# Allegro board EVK_SOM.brd
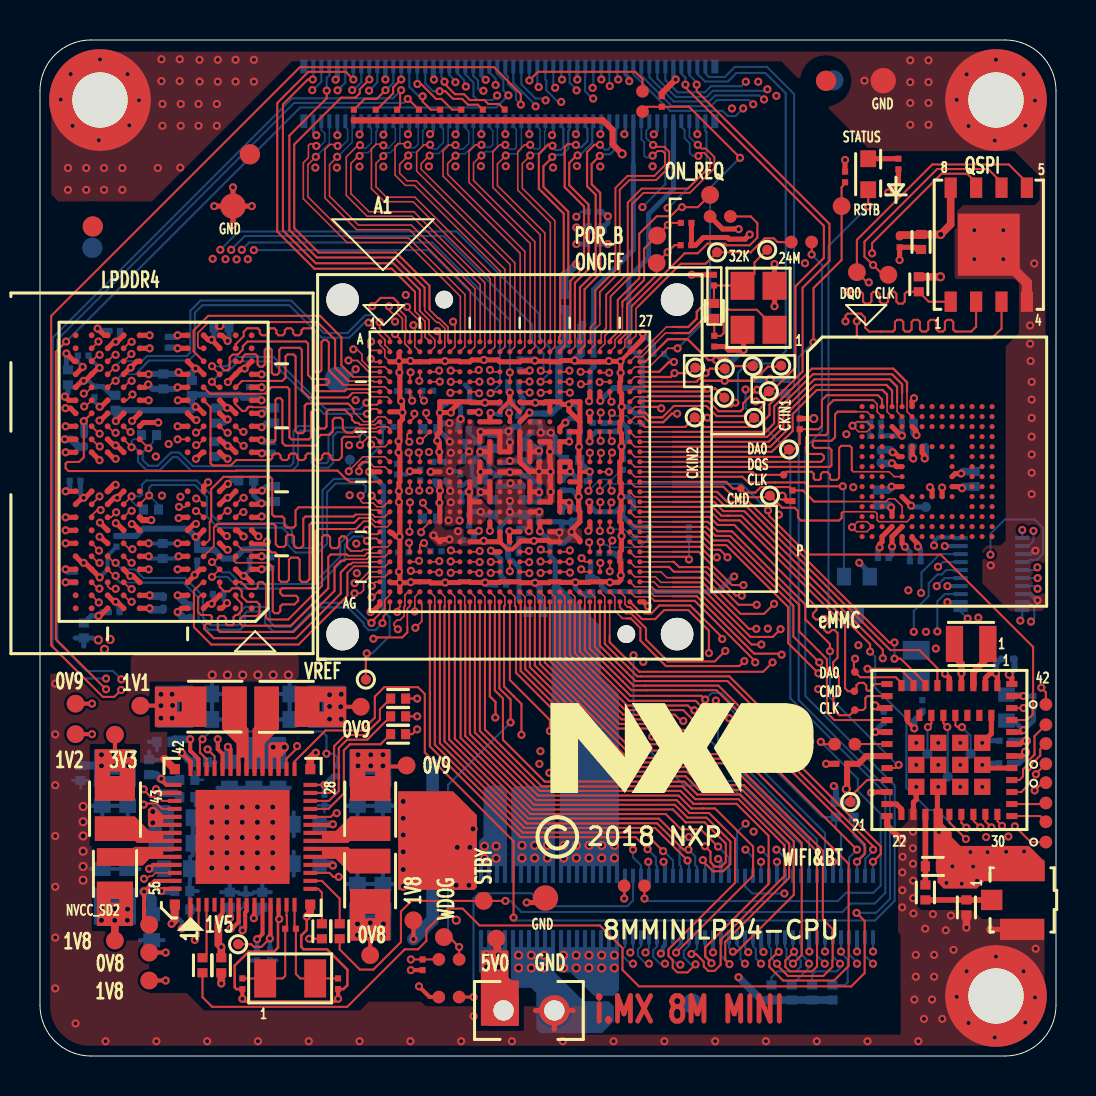
[diagram p0: board, top side]
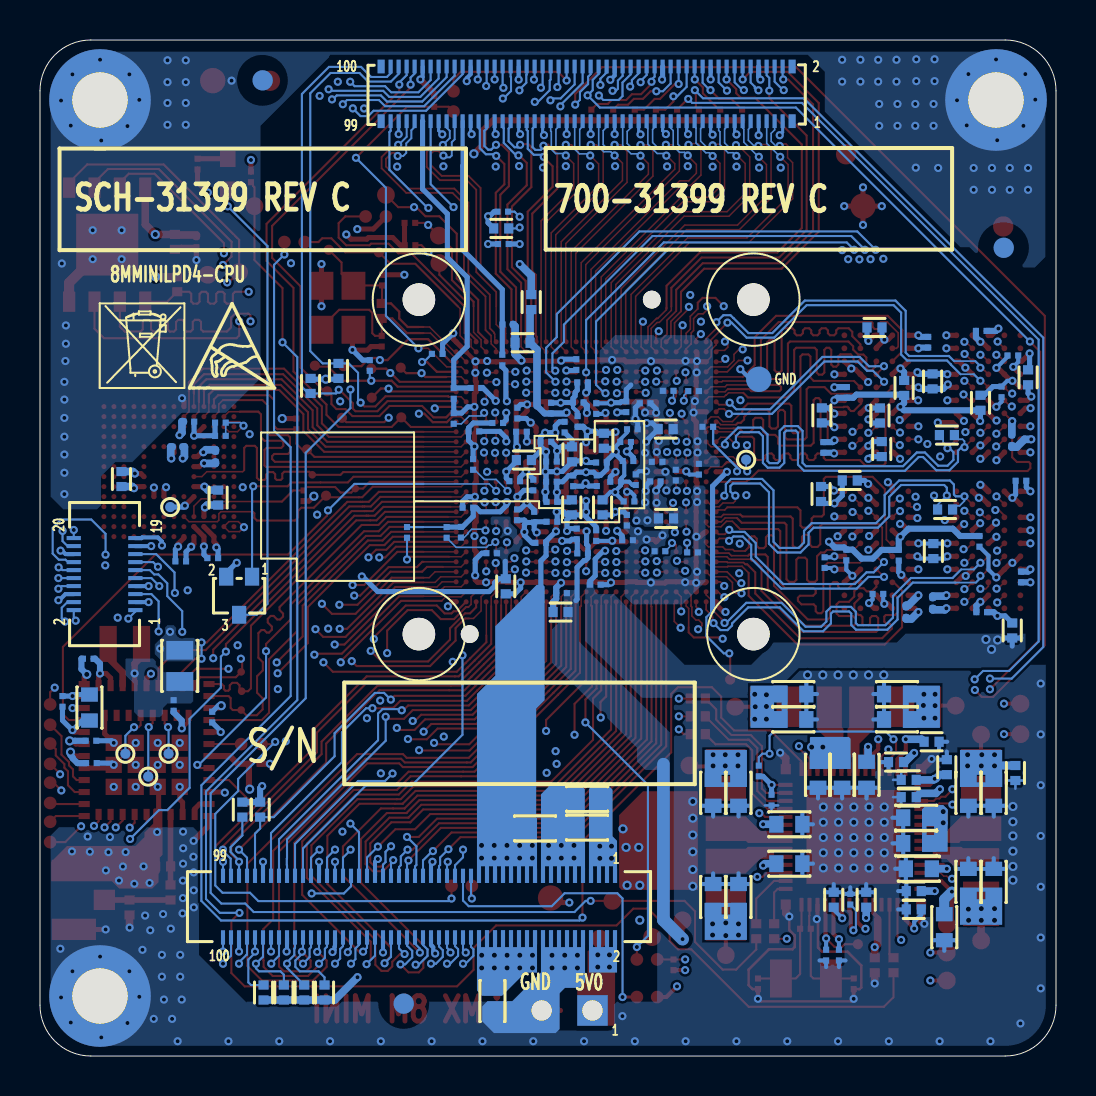
[diagram p1: board, bottom side, seen from below]

Outline 50.8 x 50.8 mm; copper layers: TOP, L2_GND_1, L3_IN1, L4_GND_2, L5_PWR_1, L6_PWR_2, L7_GND_3, BOTTOM. Coordinates in mm from the lower left corner of the outline.
Outline path: 0,48.26 0,2.54 arc(0.74,0.74) 2.54,0 48.26,0 arc(50.06,0.74) 50.8,2.54 50.8,48.26 arc(50.06,50.06) 48.26,50.8 2.54,50.8 arc(0.74,50.06) 0,48.26

## Design rules (mm)
constraint set DEFAULT: min track width 0.104
net group DIFFPAIR4: nets USB2_DN USB2_DP
net group DIFFPAIR5: nets USB1_DN USB1_DP
net group DIFFPAIR6: nets PCIE_TXN PCIE_TXP
net group DIFFPAIR7: nets PCIE_CLKN PCIE_CLKP
net group DIFFPAIR8: nets PCIE_RXN PCIE_RXP
net group DIFFPAIR9: nets DSI_DN3 DSI_DP3
net group DIFFPAIR10: nets DSI_DN2 DSI_DP2
net group DIFFPAIR11: nets DSI_CKN DSI_CKP
net group DIFFPAIR12: nets DSI_DN1 DSI_DP1
net group DIFFPAIR13: nets DSI_DN0 DSI_DP0
net group DIFFPAIR19: nets CSI_DN0 CSI_DP0
net group DIFFPAIR20: nets CSI_DN1 CSI_DP1
net group DIFFPAIR21: nets CSI_CKN CSI_CKP
net group DIFFPAIR22: nets CSI_DN2 CSI_DP2
net group DIFFPAIR23: nets CSI_DN3 CSI_DP3
net group DDRB_DATA1: nets DRAM_DATA7_B
net group M-DDRA-DATA0: nets DRAM_DATA0_A DRAM_DATA1_A DRAM_DATA2_A DRAM_DATA3_A DRAM_DATA4_A DRAM_DATA5_A DRAM_DATA6_A DRAM_DATA7_A DRAM_DMI0_A DRAM_SDQS0_C_A DRAM_SDQS0_T_A
net group M-DDRA-DATA1: nets DRAM_DATA8_A DRAM_DATA9_A DRAM_DATA10_A DRAM_DATA11_A DRAM_DATA12_A DRAM_DATA13_A DRAM_DATA14_A DRAM_DATA15_A DRAM_DMI1_A DRAM_SDQS1_C_A DRAM_SDQS1_T_A
net group M-DDRB-DATA1: nets DRAM_DATA0_B DRAM_DATA1_B DRAM_DATA2_B DRAM_DATA3_B DRAM_DATA4_B DRAM_DATA5_B DRAM_DATA6_B DRAM_DMI0_B DRAM_SDQS0_C_B DRAM_SDQS0_T_B
net group M-DDRB_DATA0: nets DRAM_DATA8_B DRAM_DATA9_B DRAM_DATA10_B DRAM_DATA11_B DRAM_DATA12_B DRAM_DATA13_B DRAM_DATA14_B DRAM_DATA15_B DRAM_DMI1_B DRAM_SDQS1_C_B DRAM_SDQS1_T_B
net group M-DDRRESS-A: nets DRAM_CA0_A DRAM_CA1_A DRAM_CA2_A DRAM_CA3_A DRAM_CA4_A DRAM_CA5_A DRAM_CKE0_A DRAM_CKE1_A DRAM_NCS0_A DRAM_NCS1_A
net group M-DDRRESS-B: nets DRAM_CA0_B DRAM_CA1_B DRAM_CA2_B DRAM_CA3_B DRAM_CA4_B DRAM_CA5_B DRAM_CKE0_B DRAM_CKE1_B DRAM_NCS0_B DRAM_NCS1_B
net group M-EMMC: nets SD3_DATA1 SD3_DATA2 SD3_DATA3 SD3_DATA4 SD3_DATA5 SD3_DATA6 SD3_DATA7 SD3_STROBE
net group M-SD1: nets SD1_CLK SD1_CMD SD1_DATA0 SD1_DATA1 SD1_DATA2 SD1_DATA3
net group M-SD2: nets SD2_CLK SD2_CMD SD2_DATA0 SD2_DATA1 SD2_DATA2 SD2_DATA3

## Placement (name value [footprint] x y rotation side)
BH1  MOUNTING HOLE  [GNDPOINT256]  47.8 47.8 0 top
BH2  MOUNTING HOLE  [GNDPOINT256]  47.8 3 0 top
BH3  MOUNTING HOLE  [GNDPOINT256]  3 47.8 0 top
C1  0.22UF  [0201_CC]  23.88 32.68 0 bottom
C2  2.2uF  [0402_CC]  27.51 23.48 270 bottom
C3  0.22UF  [0201_CC]  26.94 27.06 270 bottom
C5  0.22UF  [0201_CC]  22.99 32.37 90 bottom
C6  0.22UF  [0201_CC]  25.76 25.66 0 bottom
C8  0.22UF  [0201_CC]  21.49 32.46 90 bottom
C9  0.22UF  [0201_CC]  29.11 31.23 0 bottom
C10  2.2uF  [0402_CC]  6.22 15.71 180 bottom
C11  2.2uF  [0402_CC]  9.06 4.54 270 top
C12  2.2uF  [0402_CC]  11.11 7.81 90 bottom
C13  4.7uF  [0402_CC]  7.36 13.81 180 bottom
C14  4.7uF  [0402_CC]  7.11 7.33 180 bottom
C15  1uF  [0201_CC]  25.21 27.71 180 bottom
C16  1uF  [0201_CC]  22.73 29.67 180 bottom
C17  0.22UF  [0201_CC]  29.41 27.42 0 bottom
C18  4.7uF  [0402_CC]  7.11 8.25 180 bottom
C20  10uF  [0402_CC]  22.61 30.76 270 bottom
C21  0.22UF  [0201_CC]  23.04 23.57 180 bottom
C23  0.22UF  [0201_CC]  26.09 26.94 270 bottom
C30  0.22UF  [0201_CC]  26.93 32.15 90 bottom
C33  10uF  [0402_CC]  24.21 27.43 90 bottom
C35  1uF  [0201_CC]  22.96 28.77 90 bottom
C36  1uF  [0201_CC]  23.96 26.1 270 bottom
C48  1uF  [0201_CC]  21.45 26.79 270 bottom
C54  1uF  [0201_CC]  22.02 28.71 180 bottom
C55  10uF  [0402_CC]  22.67 27.43 90 bottom
C61  1uF  [0201_CC]  21.35 27.73 0 bottom
C65  1uF  [0201_CC]  23.92 31.73 90 bottom
C74  1uF  [0201_CC]  21.4 29.75 0 bottom
C78  1uF  [0201_CC]  21.52 30.7 0 bottom
C88  10uF  [0402_CC]  19.5 26.88 180 bottom
C89  10uF  [0402_CC]  19.51 31.35 180 bottom
C90  1uF  [0201_CC]  21.01 28.82 270 bottom
C91  1uF  [0201_CC]  19.01 29.05 90 bottom
C92  1uF  [0201_CC]  19.94 29.71 180 bottom
C93  1uF  [0201_CC]  20.03 28.73 180 bottom
C94  1uF  [0201_CC]  20.55 32.64 180 bottom
C95  1uF  [0201_CC]  21.18 31.34 0 bottom
C99  0.22UF  [0201_CC]  23.67 25.13 0 bottom
C100  0.22UF  [0201_CC]  23.67 33.68 0 bottom
C101  0.22UF  [0201_CC]  26.13 28.55 270 bottom
C104  0.22UF  [0201_CC]  27.07 28.74 0 bottom
C105  10uF  [0402_CC]  2.19 21.28 90 bottom
C106  10uF  [0402_CC]  1.4 33.93 90 bottom
C108  10uF  [0402_CC]  3.77 32.66 90 bottom
C109  10uF  [0402_CC]  7.59 33.4 90 bottom
C110  10uF  [0402_CC]  6.17 33.73 270 bottom
C111  10uF  [0402_CC]  8.71 30.35 90 bottom
C112  10uF  [0402_CC]  9.07 36.43 0 bottom
C113  10uF  [0402_CC]  11.71 32.03 90 bottom
C114  0.22UF  [0201_CC]  3.74 36.25 180 bottom
C115  10uF  [0402_CC]  6.13 25.25 270 bottom
C117  10uF  [0402_CC]  10.31 28.78 0 bottom
C118  10uF  [0402_CC]  8.8 32.02 270 bottom
C119  10uF  [0402_CC]  11.75 28.1 270 bottom
C123  12pF  [0201_CC]  33.7 38.79 90 top
C124  12pF  [0201_CC]  33.71 35.74 270 top
C127  4.7uF  [0402_CC]  46.73 28.85 90 bottom
C128  0.22UF  [0201_CC]  42.03 29.97 270 bottom
C129  0.22UF  [0201_CC]  43.92 30.46 0 bottom
C130  10uF  [0402_CC]  41.89 27.92 90 bottom
C131  0.22UF  [0201_CC]  43.36 31.72 180 bottom
C132  0.22UF  [0201_CC]  43.76 24.73 0 bottom
C133  0.22UF  [0201_CC]  42.16 24.89 0 bottom
C136  0.22UF  [0201_CC]  41.78 31.67 0 bottom
C137  1uF  [0201_CC]  41.78 31.01 0 bottom
C138  0.22UF  [0201_CC]  42.98 40.7 270 top
C139  10uF  [0402_CC]  44.05 40.7 270 top
C140  47uF  [0805_CC]  43.81 19.51 90 bottom
C141  1uF  [0201_CC]  44.12 17.53 270 bottom
C142  22uF  [0603_CC]  48.33 17.42 90 bottom
C143  0.1uF  [0201_CC]  49.68 17.73 270 bottom
C144  1uF  [0201_CC]  42.19 16.94 270 bottom
C145  0.1uF  [0201_CC]  48.39 19.86 180 bottom
C146  0.1uF  [0201_CC]  48.23 14.64 180 bottom
C147  0.1uF  [0201_CC]  48.25 15.76 180 bottom
C148  0.1uF  [0201_CC]  40.09 14.61 180 top
C234  4.7uF  [0402_CC]  26.61 29.8 180 bottom
C235  0.22UF  [0201_CC]  25.51 30.71 180 bottom
C241  0.22UF  [0201_CC]  26.73 31.21 0 bottom
C244  0.22UF  [0201_CC]  25.25 32.39 90 bottom
C245  18pF  [0201_CC]  29.14 29.58 90 bottom
C247  10uF  [0402_CC]  24.2 30.08 90 bottom
C248  1uF  [0201_CC]  25.2 26.71 0 bottom
C251  1uF  [0201_CC]  22.99 26.02 270 bottom
C253  1uF  [0201_CC]  24.14 28.76 90 bottom
C254  1uF  [0201_CC]  25.23 29.72 180 bottom
C255  1uF  [0201_CC]  25.23 28.71 180 bottom
C256  1uF  [0201_CC]  24.57 31.44 270 bottom
C260  4.7uF  [0402_CC]  2.03 14.15 270 bottom
C264  0.22UF  [0201_CC]  21.42 25.79 180 bottom
C265  10uF  [0402_CC]  24.77 22.2 0 bottom
C266  10uF  [0402_CC]  5.46 14.44 90 bottom
C267  1uF  [0201_CC]  17.86 29.34 90 bottom
C268  2200PF  [0201_CC]  23.98 34.57 90 bottom
C272  1uF  [0201_CC]  14.22 12.8 90 bottom
C273  1uF  [0201_CC]  11.49 5.05 270 bottom
C275  22uF  [0603_CC]  15.87 7.95 90 bottom
C279  10uF  [0603_CC]  10.69 14.06 90 bottom
C281  10uF  [0603_CC]  13.33 11.59 0 bottom
C283  22uF  [0603_CC]  17.14 13.16 270 bottom
C285  22uF  [0603_CC]  17.14 7.95 90 bottom
C287  22uF  [0603_CC]  15.87 13.16 270 bottom
C295  10uF  [0603_CC]  13.33 9.62 0 bottom
C298  18pF  [0201_CC]  14.9 3.61 270 top
C299  18pF  [0201_CC]  10.12 3.61 270 top
C301  10uF  [0603_CC]  11.9 14.06 90 bottom
C303  22uF  [0603_CC]  13.13 18.1 180 bottom
C304  22uF  [0603_CC]  13.13 16.83 180 bottom
C306  10uF  [0603_CC]  6.99 10.63 180 bottom
C307  10uF  [0603_CC]  6.99 11.91 180 bottom
C311  22uF  [0603_CC]  4.38 13.16 270 bottom
C312  22uF  [0603_CC]  3.11 13.16 270 bottom
C316  10uF  [0603_CC]  6.86 9.36 180 bottom
C317  22uF  [0603_CC]  4.38 8.71 90 bottom
C318  22uF  [0603_CC]  3.11 8.71 90 bottom
C323  10uF  [0603_CC]  9.47 14.06 90 bottom
C324  22uF  [0603_CC]  7.95 16.83 0 bottom
C325  22uF  [0603_CC]  7.95 18.1 0 bottom
C333  1uF  [0201_CC]  10.85 5.05 270 bottom
C337  1uF  [0201_CC]  10.29 7.84 90 bottom
C351  4.7uF  [0402_CC]  7.36 12.94 0 bottom
C360  4.7uF  [0402_CC]  8 14.7 0 bottom
C363  4.7uF  [0402_CC]  9.49 7.81 90 bottom
C365  10uF  [0603_CC]  5.59 6.44 270 bottom
C370  0.22UF  [0201_CC]  10.49 25.05 270 bottom
C371  0.22UF  [0201_CC]  7.86 25.04 270 bottom
C372  0.22UF  [0201_CC]  3.83 25.73 270 bottom
C373  0.22UF  [0201_CC]  2.16 35.03 0 bottom
C374  0.22UF  [0201_CC]  1.75 28.76 0 bottom
C375  0.22UF  [0201_CC]  2.72 33.21 90 bottom
C376  0.22UF  [0201_CC]  11.63 30.43 90 bottom
C378  0.22UF  [0201_CC]  6.39 35.69 90 bottom
C379  0.22UF  [0201_CC]  8.91 23.1 0 bottom
C380  0.22UF  [0201_CC]  3.71 22.19 180 bottom
C381  0.22UF  [0201_CC]  1.75 23.95 270 bottom
C382  0.22UF  [0201_CC]  11.57 24.67 90 bottom
C384  0.22UF  [0201_CC]  10.46 33.18 90 bottom
C391  1uF  [0201_CC]  27.91 31.65 0 bottom
C392  0.22UF  [0201_CC]  28.21 25.14 0 bottom
C393  0.22UF  [0201_CC]  27.41 36.58 180 bottom
C394  0.22UF  [0201_CC]  30.11 33.13 270 bottom
C400  0.22UF  [0201_CC]  24.72 23.14 0 bottom
C401  10uF  [0603_CC]  23.44 12.86 180 bottom
C402  10uF  [0603_CC]  23.44 11.42 180 bottom
C403  22uF  [0603_CC]  26.04 11.38 180 bottom
C404  22uF  [0603_CC]  28.18 2.75 270 bottom
C405  2.2uF  [0402_CC]  26.67 35.66 0 bottom
D1  LED GREEN  [LED_0603]  41.41 44.09 270 top
J2  MXC3N2001  [CON_3_UFL_R_SMT]  49.11 7.8 90 top
J4  DF40C-100DP-0.4V(51)  [CON100_0P4_21P7X2P05_SM]  23.47 48.11 0 bottom
J5  DF40C-100DS-0.4V(51)  [CON100_0P4_22P8X3P1_SM]  31.85 7.47 0 bottom
J6  HDR 1X2 TH  [HDR102]  23.18 2.28 90 top
J7  DF40C-20DS-0.4V(51)  [CON20_0P4_6P8X3P1_SM]  47.57 24.1 90 bottom
L2  1.5uH  [IND_2016A]  46.56 20.6 180 top
L3  2.2nH  [0402_CC]  46.32 7.43 270 top
L4  1.3nH  [0402_CC]  44.64 9.48 0 top
L5  0.47uH  [IND_SPH2520]  16.51 8.74 270 top
L6  0.47uH  [IND_SPH2520]  16.51 12.37 90 top
L10  0.47uH  [IND_SPH2520]  12.34 17.46 0 top
L11  1uH  [IND_SPH2520]  3.75 12.37 90 top
L13  0.47uH  [IND_2016A]  3.75 9.12 270 top
L15  0.47uH  [IND_SPH2520]  8.71 17.46 180 top
NOREF  -  []  6.74 14.34 90 top
NOREF#2  -  []  34.37 19.1 0 top
NOREF#3  -  [unnamed#2]  23.49 29.46 270 top
NOREF#4  -  []  6.74 14.34 0 top
NOREF#5  -  []  20.63 7.45 90 top
NOREF#6  -  []  7.53 14.34 0 top
NOREF#7  -  []  13.63 7.45 0 top
NOREF#8  -  []  1.13 21.91 90 top
NOREF#9  -  [unnamed#3]  2.64 41.48 0 top
NOREF#10  -  []  47.27 12.08 0 top
NOREF#11  -  []  25.53 13.15 0 top
NOREF#12  -  []  27.36 2.21 0 top
NOREF#13  -  []  -264.82 291.64 0 top
NOREF#14  -  []  13.52 8.36 90 top
NOREF#15  -  []  41.65 5.93 90 top
NOREF#16  -  []  13.51 14.34 0 top
NOREF#17  -  []  46 20.7 90 top
NOREF#18  -  []  -292.82 -210.12 0 top
NOREF#19  -  []  641.81 -152.03 0 top
NOREF#20  -  []  41.62 6.72 90 top
NOREF#21  -  []  22.05 9.01 0 top
NOREF#22  -  [unnamed#3]  39.3 48.76 0 top
NOREF#23  -  []  1.78 22.38 90 top
NOREF#24  -  []  43.25 5.9 90 top
NOREF#25  -  []  9.78 36.03 0 top
NOREF#26  -  []  1.78 36.03 0 top
NOREF#27  -  []  13.51 7.57 90 top
NOREF#28  -  []  46 27.5 0 top
NOREF#29  -  [unnamed#3]  10.49 45.08 90 top
NOREF#30  -  []  41.77 19.1 90 top
NOREF#31  -  []  43.07 12.08 0 top
NOREF#32  -  []  1.13 36.51 0 top
NOREF#33  -  []  46.03 25.9 0 top
NOREF#34  -  []  -38.84 -146.35 0 top
NOREF#35  -  []  25.87 10.93 0 top
NOREF#36  -  []  46.03 22.3 90 top
NOREF#37  -  []  20.45 9.04 0 top
NOREF#38  -  []  0.16 0.59 0 top
NOREF#39  -  []  279.89 66.11 0 top
NOREF#40  -  []  22.85 9.01 0 top
NOREF#41  -  []  43.81 14.56 90 top
NOREF#42  -  []  38.33 6.17 0 top
NOREF#43  -  []  -25.43 -42.54 0 top
NOREF#44  -  []  48.62 7.8 0 top
NOREF#45  -  []  43.37 17.03 0 top
NOREF#46  -  []  13.52 11.96 90 top
NOREF#47  -  []  46.03 22.3 90 top
NOREF#48  -  []  42.35 12 0 top
NOREF#49  -  []  7.53 14.34 0 top
NOREF#50  -  []  23.49 29.21 0 top
NOREF#51  -  []  1.78 22.38 90 top
NOREF#52  -  [unnamed#3]  2.61 40.41 180 bottom
NOREF#53  -  [unnamed#3]  39.67 48.78 180 bottom
NOREF#54  -  [unnamed#3]  32.61 2.62 270 bottom
Q1  NX3008NBKW,115  [SC70_3]  40.84 23.01 0 bottom
QZ2  32.768KHZ  [XTAL2-3P2X1P5-SM]  12.51 3.88 0 top
R4  10K  [0201_CC]  2.21 30.78 90 bottom
R5  240 OHM  [0201_CC]  7.49 22.19 270 bottom
R6  240 OHM  [0201_CC]  6.16 22.65 270 bottom
R7  240 OHM  [0201_CC]  17.41 31.46 180 bottom
R8  150  [0402_CC]  5.45 31.05 180 bottom
R9  150  [0402_CC]  5.55 27.33 180 bottom
R10  4.7K  [0201_CC]  17.85 47.05 90 top
R11  4.7K  [0201_CC]  18.95 47.05 90 top
R12  4.7K  [0201_CC]  15.69 47.05 90 top
R13  4.7K  [0201_CC]  16.79 47.05 90 top
R14  4.7K  [0201_CC]  20.01 47.05 90 top
R15  4.7K  [0201_CC]  21.06 47.05 90 top
R16  4.7K  [0201_CC]  22.14 47.05 90 top
R17  4.7K  [0201_CC]  23.23 47.05 90 top
R18  10K  [0201_CC]  34.31 34.53 90 bottom
R20  100K  [0201_CC]  32.31 41.66 180 top
R21  100K  [0201_CC]  32.3 40.54 180 top
R23  10K  [0201_CC]  30.94 35.1 180 bottom
R26  510K  [0402_CC]  33.71 37.25 270 top
R28  8.2K  [0402_CC]  27.74 41.38 0 bottom
R29  200 OHM  [0201_CC]  27.66 42.22 0 bottom
R30  200 OHM  [0201_CC]  27.63 40.6 0 bottom
R37  10K  [0402_CC]  43.94 38.59 270 top
R44  0  [0402_CC]  44.27 8.18 90 top
R47  10K  [0402_CC]  35.88 34.26 270 bottom
R48  0  [0402_CC]  17.91 16.98 180 top
R51  0  [0402_CC]  14.1 6.24 90 top
R52  0  [0402_CC]  14.98 6.24 90 top
R54  0  [0402_CC]  17.91 17.87 180 top
R55  0  [RC0402_25]  20.45 4.83 180 top
R57  1M  [0201_CC]  12.53 6.36 180 top
R61  100K  [0201_CC]  14.86 14.25 90 bottom
R71  10K  [0402_CC]  39.62 3.17 270 bottom
R72  10K  [0402_CC]  38.61 3.17 270 bottom
R75  10K  [0402_CC]  37.59 3.17 270 bottom
R76  10K  [0402_CC]  36.57 3.17 270 bottom
R79  10K  [0402_CC]  37.27 33.5 90 bottom
R95  10K  [0402_CC]  40.68 12.32 90 bottom
R97  10K  [0402_CC]  39.79 12.32 90 bottom
R100  0  [RC0402_25]  38.07 40.7 180 top
R102  100K  [0201_CC]  40.25 43.95 270 top
R103  100K  [0201_CC]  30.11 31.88 90 bottom
R106  100K  [0201_CC]  19.13 4.56 90 top
R108  30K  [0201_CC]  27.68 34.8 90 bottom
R109  30K  [0201_CC]  29.01 33.4 0 bottom
R111  0  [0402_CC]  8.12 4.54 270 top
R113  0  [RC0402_25]  34.01 41.98 0 top
R114  0  [0402_CC]  17.91 16.09 0 top
R115  0  [RC0402_25]  40.24 15.59 0 top
R116  0  [RC0402_25]  29.72 8.51 180 top
R117  10K  [0201_CC]  37.98 31.6 270 top
R118  10K  [0201_CC]  37.62 28.01 90 top
R119  10K  [0201_CC]  30.47 26.18 270 bottom
R120  10K  [0201_CC]  29.76 26.19 270 bottom
R121  10K  [0201_CC]  18.12 33.25 0 bottom
R122  10K  [0201_CC]  19.39 33.26 180 bottom
R123  10K  [0201_CC]  18.17 25.18 0 bottom
R124  10K  [0201_CC]  19.8 25.24 180 bottom
R125  1K  [0201_CC]  42.92 44.6 90 top
R127  0  [RC0402_25]  20.45 2.95 180 top
R129  0  [RC0402_25]  50.29 11.2 270 top
R130  0  [RC0402_25]  50.29 13.16 90 top
R131  0  [RC0402_25]  50.29 15.11 270 top
R132  0  [RC0402_25]  50.29 17.07 90 top
R133  4.7K  [0201_CC]  32.45 26.18 270 bottom
R134  0  [RC0402_25]  30.13 47.73 90 top
R135  100K  [0201_CC]  31.09 47.73 90 top
R136  0  [0402_CC]  26.24 37.7 90 bottom
TP1  -  [TPAD_020]  35.63 34.49 0 top
TP2  -  [TPAD_020]  34.24 34.37 0 top
TP3  -  [TPAD_020]  34.21 32.92 0 top
TP4  -  [TPAD_020]  37.06 34.52 0 top
TP5  -  [TPAD_020]  32.76 34.42 0 top
TP6  TP_35MIL  [TESTPOINT_35MIL]  33.5 43.05 0 top
TP7  TP_35MIL  [TESTPOINT_35MIL]  30.83 39.65 180 top
TP8  TP_35MIL  [TESTPOINT_35MIL]  40.08 42.49 270 top
TP9  TP_35MIL  [TESTPOINT_35MIL]  30.86 41.02 0 top
TP10  TP_35MIL  [TESTPOINT_35MIL]  22.19 7.76 0 top
TP11  -  [TPAD_020]  40.51 12.7 90 top
TP12  -  [TPAD_020]  45.39 13.97 270 bottom
TP13  -  [TPAD_020]  44.37 15.11 270 bottom
TP14  -  [TPAD_020]  46.53 15.11 270 bottom
TP15  -  [TPAD_020]  15.49 29.81 180 bottom
TP16  TP_35MIL  [TESTPOINT_35MIL]  40.84 39.19 180 top
TP17  TP_35MIL  [TESTPOINT_35MIL]  42.42 39.06 180 top
TP18  -  [TPAD_020]  44.29 27.45 180 bottom
TP19  -  [TPAD_020]  35.7 31.91 0 top
TP20  -  [TPAD_020]  36.44 33.24 0 top
TP21  -  [TPAD_020]  32.74 31.93 0 top
TP22  TP_35MIL  [TESTPOINT_35MIL]  16.51 5.04 0 top
TP23  TP_35MIL  [TESTPOINT_35MIL]  18.33 14.52 90 top
TP24  TP_35MIL  [TESTPOINT_35MIL]  16.04 17.46 90 top
TP25  TP_35MIL  [TESTPOINT_35MIL]  3.75 16.07 0 top
TP26  TP_35MIL  [TESTPOINT_35MIL]  3.75 5.77 0 top
TP27  TP_35MIL  [TESTPOINT_35MIL]  5.02 17.52 270 top
TP28  TP_35MIL  [TESTPOINT_35MIL]  5.46 3.77 0 top
TP29  TP_35MIL  [TESTPOINT_35MIL]  5.46 5.17 0 top
TP30  TP_35MIL  [TESTPOINT_35MIL]  1.78 17.62 0 top
TP31  TP_35MIL  [TESTPOINT_35MIL]  1.78 16.09 0 top
TP32  TP_35MIL  [TESTPOINT_35MIL]  18.67 6.78 0 top
TP33  TP_35MIL  [TESTPOINT_35MIL]  5.46 6.57 0 top
TP34  -  [TPAD_020]  36.5 28.02 0 top
TP35  -  [TPAD_015]  35.04 28.37 0 top
TP36  -  [TPAD_020]  37.45 30.33 0 top
TP37  -  [TPAD_020]  16.29 18.82 0 top
TP38  -  [TPAD_020]  36.36 40.31 0 top
TP39  -  [TPAD_020]  33.85 40.18 0 top
TP40  -  [TPAD_015]  37.19 29.06 0 top
TP44  -  [TPAD_050]  9.65 42.49 0 top
TP45  -  [TPAD_050]  25.27 7.9 0 top
TP46  -  [TPAD_050]  42.16 48.77 0 top
TP47  -  [TPAD_050]  14.86 33.83 180 bottom
TP48  -  [TPAD_015]  40.74 17.3 0 top
TP49  -  [TPAD_015]  40.72 18.24 0 top
TP50  -  [TPAD_015]  40.74 19.2 0 top
TP51  TP_35MIL  [TESTPOINT_35MIL]  22.82 5.87 0 top
TP52  -  [TPAD_020]  9.91 5.59 0 top
TP53  TP_35MIL  [TESTPOINT_35MIL]  20.19 5.95 0 top
U1  MIMX8MM6DVTLZAA  [BGA486_0P5_14X14]  23.49 29.21 0 top
U2  MT53D512M32D2DS-053 WT:D  [BGA200_0P65X0P8_10P1X14P6]  6.18 29.21 180 top
U4  SDINBDG4-16G-I1  [FBGA153_0P5_11P5X13]  44.35 29.22 0 top
U5  MT25QU256ABA1EW7-0SIT  [DFN8_1P27_6X5MM_3P1]  47.44 40.57 90 top
U6  LBEE5KL1PJ  [LQFN62_0P6_7P6X7P4]  45.47 15.3 270 top
U8  BD71847MWV  [UQFN56_0P4_7X7_EP_S185]  10.13 10.96 90 top
Y1  24MHZ  [XTLOSC4_3P2X2P5MM_SM]  35.93 37.41 90 top

## Library data of the parts
BH1-BH3 = MOUNT_HOLE
C1-C3 C5 C6 C8-C18 C20 C21 C23 C30 C33 C35 C36 C48 C54 C55 C61 C65 C74 C78 C88-C95 C99-C101 C104-C106 C108-C115 C117-C119 C123 C124 C127-C133 C136-C148 C234 C235 C241 C244 C245 C247 C248 C251 C253-C256 C260 C264-C268 C272 C273 C275 C279 C281 C283 C285 C287 C295 C298 C299 C301 C303 C304 C306 C307 C311 C312 C316-C318 C323-C325 C333 C337 C351 C360 C363 C365 C370-C376 C378-C382 C384 C391-C394 C400-C405 = CAP_NP
D1 = LED
J2 = UFL
J4 J5 = HDR_2X50_M
J6 = CONN_HDR_2X1
J7 = CONN_HDR_10X2
L2 L3 L11 L13 = INDUCTOR
L4 = IND
L5 L6 L10 L15 = INDUCTOR: tolerance: 20%
Q1 = NMOS_NX3008NBK
QZ2 = XTAL
R4-R18 R20 R21 R23 R26 R28-R30 R37 R44 R48 R51 R52 R54 R55 R57 R61 R102 R103 R106 R108 R109 R114-R125 R127 R133 R135 = RES
R47 R71 R72 R75 R76 R79 R95 R97 = RES: tolerance: 5%
R100 R111 R113 R129-R132 R134 R136 = RES: tolerance: 1%
TP1-TP5 TP11-TP15 TP18-TP21 TP34-TP40 TP44-TP50 TP52 = TESTLOOP
TP6-TP10 TP16 TP17 TP22-TP33 TP51 TP53 = T POINT R: Tolerance: TOLERANCE; User Part Number: 510-75618
U1 = MIMX8MM_BGA486P
U2 = MT53D512M32D2DS_BGA200P
U4 = SDINBDG4-16G_VFBGA_153P
U5 = MT25QL256ABA1EW9_9P
U6 = LBEE5KL1PJ_QFN62
U8 = BD71847MWV_UQFN56
Y1 = XTAL_13Y

## Footprints (pads in the part's own frame, mm; a bottom-side part is the same pattern mirrored in y, then rotated)
0201_CC
  rect 0.305x0.305 smd: 1(-0.267,0) 2(0.267,0)
0402_CC
  rect 0.457x0.508 smd: 1(-0.375,0) 2(0.375,0)
0603_CC
  rect 0.711x0.838 smd: 1(-0.65,0) 2(0.65,0)
0805_CC
  rect 0.94x1.346 smd: 1(-0.78,0) 2(0.78,0)
BGA200_0P65X0P8_10P1X14P6
  round 0.292 smd: A1(-4.4,6.825) A2(-3.6,6.825) A3(-2.8,6.825) A4(-2,6.825) A5(-1.2,6.825) A8(1.2,6.825) A9(2,6.825) A10(2.8,6.825) A11(3.6,6.825) A12(4.4,6.825) AA1(-4.4,-6.175) AA2(-3.6,-6.175) AA3(-2.8,-6.175) AA4(-2,-6.175) AA5(-1.2,-6.175) AA8(1.2,-6.175) AA9(2,-6.175) AA10(2.8,-6.175) AA11(3.6,-6.175) AA12(4.4,-6.175) AB1(-4.4,-6.825) AB2(-3.6,-6.825) AB3(-2.8,-6.825) AB4(-2,-6.825) AB5(-1.2,-6.825) AB8(1.2,-6.825) AB9(2,-6.825) AB10(2.8,-6.825) AB11(3.6,-6.825) AB12(4.4,-6.825) B1(-4.4,6.175) B2(-3.6,6.175) B3(-2.8,6.175) B4(-2,6.175) B5(-1.2,6.175) B8(1.2,6.175) B9(2,6.175) B10(2.8,6.175) B11(3.6,6.175) B12(4.4,6.175) C1(-4.4,5.525) C2(-3.6,5.525) C3(-2.8,5.525) C4(-2,5.525) C5(-1.2,5.525) C8(1.2,5.525) C9(2,5.525) C10(2.8,5.525) C11(3.6,5.525) C12(4.4,5.525) D1(-4.4,4.875) D2(-3.6,4.875) D3(-2.8,4.875) D4(-2,4.875) D5(-1.2,4.875) D8(1.2,4.875) D9(2,4.875) D10(2.8,4.875) D11(3.6,4.875) D12(4.4,4.875) E1(-4.4,4.225) E2(-3.6,4.225) E3(-2.8,4.225) E4(-2,4.225) E5(-1.2,4.225) E8(1.2,4.225) E9(2,4.225) E10(2.8,4.225) E11(3.6,4.225) E12(4.4,4.225) F1(-4.4,3.575) F2(-3.6,3.575) F3(-2.8,3.575) F4(-2,3.575) F5(-1.2,3.575) F8(1.2,3.575) F9(2,3.575) F10(2.8,3.575) F11(3.6,3.575) F12(4.4,3.575) G1(-4.4,2.925) G2(-3.6,2.925) G3(-2.8,2.925) G4(-2,2.925) G5(-1.2,2.925) G8(1.2,2.925) G9(2,2.925) G10(2.8,2.925) G11(3.6,2.925) G12(4.4,2.925) H1(-4.4,2.275) H2(-3.6,2.275) H3(-2.8,2.275) H4(-2,2.275) H5(-1.2,2.275) H8(1.2,2.275) H9(2,2.275) H10(2.8,2.275) H11(3.6,2.275) H12(4.4,2.275) J1(-4.4,1.625) J2(-3.6,1.625) J3(-2.8,1.625) J4(-2,1.625) J5(-1.2,1.625) J8(1.2,1.625) J9(2,1.625) J10(2.8,1.625) J11(3.6,1.625) J12(4.4,1.625) K1(-4.4,0.975) K2(-3.6,0.975) K3(-2.8,0.975) K4(-2,0.975) K5(-1.2,0.975) K8(1.2,0.975) K9(2,0.975) K10(2.8,0.975) K11(3.6,0.975) K12(4.4,0.975) N1(-4.4,-0.975) N2(-3.6,-0.975) N3(-2.8,-0.975) N4(-2,-0.975) N5(-1.2,-0.975) N8(1.2,-0.975) N9(2,-0.975) N10(2.8,-0.975) N11(3.6,-0.975) N12(4.4,-0.975) P1(-4.4,-1.625) P2(-3.6,-1.625) P3(-2.8,-1.625) P4(-2,-1.625) P5(-1.2,-1.625) P8(1.2,-1.625) P9(2,-1.625) P10(2.8,-1.625) P11(3.6,-1.625) P12(4.4,-1.625) R1(-4.4,-2.275) R2(-3.6,-2.275) R3(-2.8,-2.275) R4(-2,-2.275) R5(-1.2,-2.275) R8(1.2,-2.275) R9(2,-2.275) R10(2.8,-2.275) R11(3.6,-2.275) R12(4.4,-2.275) T1(-4.4,-2.925) T2(-3.6,-2.925) T3(-2.8,-2.925) T4(-2,-2.925) T5(-1.2,-2.925) T8(1.2,-2.925) T9(2,-2.925) T10(2.8,-2.925) T11(3.6,-2.925) T12(4.4,-2.925) U1(-4.4,-3.575) U2(-3.6,-3.575) U3(-2.8,-3.575) U4(-2,-3.575) U5(-1.2,-3.575) U8(1.2,-3.575) U9(2,-3.575) U10(2.8,-3.575) U11(3.6,-3.575) U12(4.4,-3.575) V1(-4.4,-4.225) V2(-3.6,-4.225) V3(-2.8,-4.225) V4(-2,-4.225) V5(-1.2,-4.225) V8(1.2,-4.225) V9(2,-4.225) V10(2.8,-4.225) V11(3.6,-4.225) V12(4.4,-4.225) W1(-4.4,-4.875) W2(-3.6,-4.875) W3(-2.8,-4.875) W4(-2,-4.875) W5(-1.2,-4.875) W8(1.2,-4.875) W9(2,-4.875) W10(2.8,-4.875) W11(3.6,-4.875) W12(4.4,-4.875) Y1(-4.4,-5.525) Y2(-3.6,-5.525) Y3(-2.8,-5.525) Y4(-2,-5.525) Y5(-1.2,-5.525) Y8(1.2,-5.525) Y9(2,-5.525) Y10(2.8,-5.525) Y11(3.6,-5.525) Y12(4.4,-5.525)
BGA486_0P5_14X14
  round 0.254 smd: A1(-6.5,6.5) A2(-6,6.5) A3(-5.5,6.5) A4(-5,6.5) A5(-4.5,6.5) A6(-4,6.5) A7(-3.5,6.5) A8(-3,6.5) A9(-2.5,6.5) A10(-2,6.5) A11(-1.5,6.5) A12(-1,6.5) A13(-0.5,6.5) A14(0,6.5) A15(0.5,6.5) A16(1,6.5) A17(1.5,6.5) A18(2,6.5) A19(2.5,6.5) A20(3,6.5) A21(3.5,6.5) A22(4,6.5) A23(4.5,6.5) A24(5,6.5) A25(5.5,6.5) A26(6,6.5) A27(6.5,6.5) AA1(-6.5,-3.5) AA2(-6,-3.5) AA7(-3.5,-3.5) AA9(-2.5,-3.5) AA10(-2,-3.5) AA13(-0.5,-3.5) AA14(0,-3.5) AA15(0.5,-3.5) AA18(2,-3.5) AA19(2.5,-3.5) AA21(3.5,-3.5) AA26(6,-3.5) AA27(6.5,-3.5) AB1(-6.5,-4) AB2(-6,-4) AB3(-5.5,-4) AB4(-5,-4) AB5(-4.5,-4) AB6(-4,-4) AB9(-2.5,-4) AB10(-2,-4) AB13(-0.5,-4) AB15(0.5,-4) AB18(2,-4) AB19(2.5,-4) AB22(4,-4) AB23(4.5,-4) AB24(5,-4) AB25(5.5,-4) AB26(6,-4) AB27(6.5,-4) AC1(-6.5,-4.5) AC2(-6,-4.5) AC3(-5.5,-4.5) AC4(-5,-4.5) AC6(-4,-4.5) AC9(-2.5,-4.5) AC10(-2,-4.5) AC13(-0.5,-4.5) AC14(0,-4.5) AC15(0.5,-4.5) AC18(2,-4.5) AC19(2.5,-4.5) AC22(4,-4.5) AC24(5,-4.5) AC25(5.5,-4.5) AC26(6,-4.5) AC27(6.5,-4.5) AD1(-6.5,-5) AD2(-6,-5) AD5(-4.5,-5) AD6(-4,-5) AD9(-2.5,-5) AD10(-2,-5) AD13(-0.5,-5) AD15(0.5,-5) AD18(2,-5) AD19(2.5,-5) AD22(4,-5) AD23(4.5,-5) AD26(6,-5) AD27(6.5,-5) AE1(-6.5,-5.5) AE2(-6,-5.5) AE5(-4.5,-5.5) AE6(-4,-5.5) AE9(-2.5,-5.5) AE10(-2,-5.5) AE13(-0.5,-5.5) AE14(0,-5.5) AE15(0.5,-5.5) AE18(2,-5.5) AE19(2.5,-5.5) AE22(4,-5.5) AE23(4.5,-5.5) AE26(6,-5.5) AE27(6.5,-5.5) AF1(-6.5,-6) AF2(-6,-6) AF3(-5.5,-6) AF4(-5,-6) AF5(-4.5,-6) AF6(-4,-6) AF7(-3.5,-6) AF8(-3,-6) AF9(-2.5,-6) AF10(-2,-6) AF11(-1.5,-6) AF12(-1,-6) AF13(-0.5,-6) AF14(0,-6) AF15(0.5,-6) AF16(1,-6) AF17(1.5,-6) AF18(2,-6) AF19(2.5,-6) AF20(3,-6) AF21(3.5,-6) AF22(4,-6) AF23(4.5,-6) AF24(5,-6) AF25(5.5,-6) AF26(6,-6) AF27(6.5,-6) AG1(-6.5,-6.5) AG2(-6,-6.5) AG3(-5.5,-6.5) AG4(-5,-6.5) AG5(-4.5,-6.5) AG6(-4,-6.5) AG7(-3.5,-6.5) AG8(-3,-6.5) AG9(-2.5,-6.5) AG10(-2,-6.5) AG11(-1.5,-6.5) AG12(-1,-6.5) AG13(-0.5,-6.5) AG14(0,-6.5) AG15(0.5,-6.5) AG16(1,-6.5) AG17(1.5,-6.5) AG18(2,-6.5) AG19(2.5,-6.5) AG20(3,-6.5) AG21(3.5,-6.5) AG22(4,-6.5) AG23(4.5,-6.5) AG24(5,-6.5) AG25(5.5,-6.5) AG26(6,-6.5) AG27(6.5,-6.5) B1(-6.5,6) B2(-6,6) B3(-5.5,6) B4(-5,6) B5(-4.5,6) B6(-4,6) B7(-3.5,6) B8(-3,6) B9(-2.5,6) B10(-2,6) B11(-1.5,6) B12(-1,6) B13(-0.5,6) B14(0,6) B15(0.5,6) B16(1,6) B17(1.5,6) B18(2,6) B19(2.5,6) B20(3,6) B21(3.5,6) B22(4,6) B23(4.5,6) B24(5,6) B25(5.5,6) B26(6,6) B27(6.5,6) C1(-6.5,5.5) C2(-6,5.5) C5(-4.5,5.5) C6(-4,5.5) C9(-2.5,5.5) C10(-2,5.5) C13(-0.5,5.5) C14(0,5.5) C15(0.5,5.5) C18(2,5.5) C19(2.5,5.5) C22(4,5.5) C23(4.5,5.5) C26(6,5.5) C27(6.5,5.5) D1(-6.5,5) D2(-6,5) D5(-4.5,5) D6(-4,5) D9(-2.5,5) D10(-2,5) D13(-0.5,5) D15(0.5,5) D18(2,5) D19(2.5,5) D22(4,5) D23(4.5,5) D26(6,5) D27(6.5,5) E1(-6.5,4.5) E2(-6,4.5) E3(-5.5,4.5) E4(-5,4.5) E6(-4,4.5) E9(-2.5,4.5) E10(-2,4.5) E13(-0.5,4.5) E14(0,4.5) E15(0.5,4.5) E18(2,4.5) E19(2.5,4.5) E22(4,4.5) E24(5,4.5) E25(5.5,4.5) E26(6,4.5) E27(6.5,4.5) F1(-6.5,4) F2(-6,4) F3(-5.5,4) F4(-5,4) F5(-4.5,4) F6(-4,4) F9(-2.5,4) F10(-2,4) F13(-0.5,4) F15(0.5,4) F18(2,4) F19(2.5,4) F22(4,4) F23(4.5,4) F24(5,4) F25(5.5,4) F26(6,4) F27(6.5,4) G1(-6.5,3.5) G2(-6,3.5) G7(-3.5,3.5) G9(-2.5,3.5) G10(-2,3.5) G13(-0.5,3.5) G14(0,3.5) G15(0.5,3.5) G18(2,3.5) G19(2.5,3.5) G21(3.5,3.5) G26(6,3.5) G27(6.5,3.5) H1(-6.5,3) H2(-6,3) H10(-2,3) H13(-0.5,3) H15(0.5,3) H18(2,3) H26(6,3) H27(6.5,3) J1(-6.5,2.5) J2(-6,2.5) J3(-5.5,2.5) J4(-5,2.5) J5(-4.5,2.5) J6(-4,2.5) J7(-3.5,2.5) J10(-2,2.5) J11(-1.5,2.5) J12(-1,2.5) J13(-0.5,2.5) J14(0,2.5) J15(0.5,2.5) J16(1,2.5) J17(1.5,2.5) J18(2,2.5) J21(3.5,2.5) J22(4,2.5) J23(4.5,2.5) J24(5,2.5) J25(5.5,2.5) J26(6,2.5) J27(6.5,2.5) K1(-6.5,2) K2(-6,2) K3(-5.5,2) K4(-5,2) K5(-4.5,2) K6(-4,2) K7(-3.5,2) K8(-3,2) K9(-2.5,2) K12(-1,2) K13(-0.5,2) K15(0.5,2) K16(1,2) K19(2.5,2) K20(3,2) K21(3.5,2) K22(4,2) K23(4.5,2) K24(5,2) K25(5.5,2) K26(6,2) K27(6.5,2) L1(-6.5,1.5) L2(-6,1.5) L9(-2.5,1.5) L10(-2,1.5) L11(-1.5,1.5) L12(-1,1.5) L13(-0.5,1.5) L15(0.5,1.5) L16(1,1.5) L17(1.5,1.5) L18(2,1.5) L19(2.5,1.5) L26(6,1.5) L27(6.5,1.5) M1(-6.5,1) M2(-6,1) M9(-2.5,1) M12(-1,1) M13(-0.5,1) M14(0,1) M15(0.5,1) M16(1,1) M19(2.5,1) M26(6,1) M27(6.5,1) N1(-6.5,0.5) N2(-6,0.5) N3(-5.5,0.5) N4(-5,0.5) N5(-4.5,0.5) N6(-4,0.5) N7(-3.5,0.5) N8(-3,0.5) N9(-2.5,0.5) N10(-2,0.5) N11(-1.5,0.5) N12(-1,0.5) N13(-0.5,0.5) N15(0.5,0.5) N16(1,0.5) N17(1.5,0.5) N18(2,0.5) N19(2.5,0.5) N20(3,0.5) N21(3.5,0.5) N22(4,0.5) N23(4.5,0.5) N24(5,0.5) N25(5.5,0.5) N26(6,0.5) N27(6.5,0.5) P1(-6.5,0) P2(-6,0) P3(-5.5,0) P5(-4.5,0) P7(-3.5,0) P9(-2.5,0) P12(-1,0) P13(-0.5,0) P15(0.5,0) P16(1,0) P19(2.5,0) P21(3.5,0) P23(4.5,0) P25(5.5,0) P26(6,0) P27(6.5,0) R1(-6.5,-0.5) R2(-6,-0.5) R3(-5.5,-0.5) R4(-5,-0.5) R5(-4.5,-0.5) R6(-4,-0.5) R7(-3.5,-0.5) R8(-3,-0.5) R9(-2.5,-0.5) R10(-2,-0.5) R11(-1.5,-0.5) R12(-1,-0.5) R13(-0.5,-0.5) R15(0.5,-0.5) R16(1,-0.5) R17(1.5,-0.5) R18(2,-0.5) R19(2.5,-0.5) R20(3,-0.5) R21(3.5,-0.5) R22(4,-0.5) R23(4.5,-0.5) R24(5,-0.5) R25(5.5,-0.5) R26(6,-0.5) R27(6.5,-0.5) T1(-6.5,-1) T2(-6,-1) T9(-2.5,-1) T12(-1,-1) T13(-0.5,-1) T14(0,-1) T15(0.5,-1) T16(1,-1) T19(2.5,-1) T26(6,-1) T27(6.5,-1) U1(-6.5,-1.5) U2(-6,-1.5) U9(-2.5,-1.5) U10(-2,-1.5) U11(-1.5,-1.5) U12(-1,-1.5) U13(-0.5,-1.5) U15(0.5,-1.5) U16(1,-1.5) U17(1.5,-1.5) U18(2,-1.5) U19(2.5,-1.5) U26(6,-1.5) U27(6.5,-1.5) V1(-6.5,-2) V2(-6,-2) V3(-5.5,-2) V4(-5,-2) V5(-4.5,-2) V6(-4,-2) V7(-3.5,-2) V8(-3,-2) V9(-2.5,-2) V12(-1,-2) V13(-0.5,-2) V15(0.5,-2) V16(1,-2) V19(2.5,-2) V20(3,-2) V21(3.5,-2) V22(4,-2) V23(4.5,-2) V24(5,-2) V25(5.5,-2) V26(6,-2) V27(6.5,-2) W1(-6.5,-2.5) W2(-6,-2.5) W3(-5.5,-2.5) W4(-5,-2.5) W5(-4.5,-2.5) W6(-4,-2.5) W7(-3.5,-2.5) W10(-2,-2.5) W11(-1.5,-2.5) W12(-1,-2.5) W13(-0.5,-2.5) W14(0,-2.5) W15(0.5,-2.5) W16(1,-2.5) W17(1.5,-2.5) W18(2,-2.5) W21(3.5,-2.5) W22(4,-2.5) W23(4.5,-2.5) W24(5,-2.5) W25(5.5,-2.5) W26(6,-2.5) W27(6.5,-2.5) Y1(-6.5,-3) Y2(-6,-3) Y10(-2,-3) Y13(-0.5,-3) Y15(0.5,-3) Y18(2,-3) Y26(6,-3) Y27(6.5,-3)
CON20_0P4_6P8X3P1_SM
  rect 0.203x0.711 smd: 1(-1.8,-1.54) 2(-1.8,1.54) 3(-1.4,-1.54) 4(-1.4,1.54) 5(-1,-1.54) 6(-1,1.54) 7(-0.6,-1.54) 8(-0.6,1.54) 9(-0.2,-1.54) 10(-0.2,1.54) 11(0.2,-1.54) 12(0.2,1.54) 13(0.6,-1.54) 14(0.6,1.54) 15(1,-1.54) 16(1,1.54) 17(1.4,-1.54) 18(1.4,1.54) 19(1.8,-1.54) 20(1.8,1.54)
CON100_0P4_21P7X2P05_SM
  rect 0.356x0.686 smd: (-10.275,-1.368) (-10.275,1.368) (10.275,-1.368) (10.275,1.368)
  rect 0.203x0.686 smd: 1(-9.8,1.368) 2(-9.8,-1.368) 3(-9.4,1.368) 4(-9.4,-1.368) 5(-9,1.368) 6(-9,-1.368) 7(-8.6,1.368) 8(-8.6,-1.368) 9(-8.2,1.368) 10(-8.2,-1.368) 11(-7.8,1.368) 12(-7.8,-1.368) 13(-7.4,1.368) 14(-7.4,-1.368) 15(-7,1.368) 16(-7,-1.368) 17(-6.6,1.368) 18(-6.6,-1.368) 19(-6.2,1.368) 20(-6.2,-1.368) 21(-5.8,1.368) 22(-5.8,-1.368) 23(-5.4,1.368) 24(-5.4,-1.368) 25(-5,1.368) 26(-5,-1.368) 27(-4.6,1.368) 28(-4.6,-1.368) 29(-4.2,1.368) 30(-4.2,-1.368) 31(-3.8,1.368) 32(-3.8,-1.368) 33(-3.4,1.368) 34(-3.4,-1.368) 35(-3,1.368) 36(-3,-1.368) 37(-2.6,1.368) 38(-2.6,-1.368) 39(-2.2,1.368) 40(-2.2,-1.368) 41(-1.8,1.368) 42(-1.8,-1.368) 43(-1.4,1.368) 44(-1.4,-1.368) 45(-1,1.368) 46(-1,-1.368) 47(-0.6,1.368) 48(-0.6,-1.368) 49(-0.2,1.368) 50(-0.2,-1.368) 51(0.2,1.368) 52(0.2,-1.368) 53(0.6,1.368) 54(0.6,-1.368) 55(1,1.368) 56(1,-1.368) 57(1.4,1.368) 58(1.4,-1.368) 59(1.8,1.368) 60(1.8,-1.368) 61(2.2,1.368) 62(2.2,-1.368) 63(2.6,1.368) 64(2.6,-1.368) 65(3,1.368) 66(3,-1.368) 67(3.4,1.368) 68(3.4,-1.368) 69(3.8,1.368) 70(3.8,-1.368) 71(4.2,1.368) 72(4.2,-1.368) 73(4.6,1.368) 74(4.6,-1.368) 75(5,1.368) 76(5,-1.368) 77(5.4,1.368) 78(5.4,-1.368) 79(5.8,1.368) 80(5.8,-1.368) 81(6.2,1.368) 82(6.2,-1.368) 83(6.6,1.368) 84(6.6,-1.368) 85(7,1.368) 86(7,-1.368) 87(7.4,1.368) 88(7.4,-1.368) 89(7.8,1.368) 90(7.8,-1.368) 91(8.2,1.368) 92(8.2,-1.368) 93(8.6,1.368) 94(8.6,-1.368) 95(9,1.368) 96(9,-1.368) 97(9.4,1.368) 98(9.4,-1.368) 99(9.8,1.368) 100(9.8,-1.368)
CON100_0P4_22P8X3P1_SM
  rect 0.203x0.711 smd: 1(-9.8,-1.54) 2(-9.8,1.54) 3(-9.4,-1.54) 4(-9.4,1.54) 5(-9,-1.54) 6(-9,1.54) 7(-8.6,-1.54) 8(-8.6,1.54) 9(-8.2,-1.54) 10(-8.2,1.54) 11(-7.8,-1.54) 12(-7.8,1.54) 13(-7.4,-1.54) 14(-7.4,1.54) 15(-7,-1.54) 16(-7,1.54) 17(-6.6,-1.54) 18(-6.6,1.54) 19(-6.2,-1.54) 20(-6.2,1.54) 21(-5.8,-1.54) 22(-5.8,1.54) 23(-5.4,-1.54) 24(-5.4,1.54) 25(-5,-1.54) 26(-5,1.54) 27(-4.6,-1.54) 28(-4.6,1.54) 29(-4.2,-1.54) 30(-4.2,1.54) 31(-3.8,-1.54) 32(-3.8,1.54) 33(-3.4,-1.54) 34(-3.4,1.54) 35(-3,-1.54) 36(-3,1.54) 37(-2.6,-1.54) 38(-2.6,1.54) 39(-2.2,-1.54) 40(-2.2,1.54) 41(-1.8,-1.54) 42(-1.8,1.54) 43(-1.4,-1.54) 44(-1.4,1.54) 45(-1,-1.54) 46(-1,1.54) 47(-0.6,-1.54) 48(-0.6,1.54) 49(-0.2,-1.54) 50(-0.2,1.54) 51(0.2,-1.54) 52(0.2,1.54) 53(0.6,-1.54) 54(0.6,1.54) 55(1,-1.54) 56(1,1.54) 57(1.4,-1.54) 58(1.4,1.54) 59(1.8,-1.54) 60(1.8,1.54) 61(2.2,-1.54) 62(2.2,1.54) 63(2.6,-1.54) 64(2.6,1.54) 65(3,-1.54) 66(3,1.54) 67(3.4,-1.54) 68(3.4,1.54) 69(3.8,-1.54) 70(3.8,1.54) 71(4.2,-1.54) 72(4.2,1.54) 73(4.6,-1.54) 74(4.6,1.54) 75(5,-1.54) 76(5,1.54) 77(5.4,-1.54) 78(5.4,1.54) 79(5.8,-1.54) 80(5.8,1.54) 81(6.2,-1.54) 82(6.2,1.54) 83(6.6,-1.54) 84(6.6,1.54) 85(7,-1.54) 86(7,1.54) 87(7.4,-1.54) 88(7.4,1.54) 89(7.8,-1.54) 90(7.8,1.54) 91(8.2,-1.54) 92(8.2,1.54) 93(8.6,-1.54) 94(8.6,1.54) 95(9,-1.54) 96(9,1.54) 97(9.4,-1.54) 98(9.4,1.54) 99(9.8,-1.54) 100(9.8,1.54)
CON_3_UFL_R_SMT
  rect 1.016x1.067 smd: 1(0,1.524)
  rect 1.067x2.21 smd: 2(-1.476,0) 3(1.476,0)
DFN8_1P27_6X5MM_3P1
  rect 1.016x0.61 smd: 1(-2.85,1.905) 2(-2.85,0.635) 3(-2.85,-0.635) 4(-2.85,-1.905) 5(2.85,-1.905) 6(2.85,-0.635) 7(2.85,0.635) 8(2.85,1.905)
  rect 3.099x3.099 smd: 9(0,0)
FBGA153_0P5_11P5X13
  round 0.254 smd: A1(-3.25,3.25) A2(-2.75,3.25) A3(-2.25,3.25) A4(-1.75,3.25) A5(-1.25,3.25) A6(-0.75,3.25) A7(-0.25,3.25) A8(0.25,3.25) A9(0.75,3.25) A10(1.25,3.25) A11(1.75,3.25) A12(2.25,3.25) A13(2.75,3.25) A14(3.25,3.25) B1(-3.25,2.75) B2(-2.75,2.75) B3(-2.25,2.75) B4(-1.75,2.75) B5(-1.25,2.75) B6(-0.75,2.75) B7(-0.25,2.75) B8(0.25,2.75) B9(0.75,2.75) B10(1.25,2.75) B11(1.75,2.75) B12(2.25,2.75) B13(2.75,2.75) B14(3.25,2.75) C1(-3.25,2.25) C2(-2.75,2.25) C3(-2.25,2.25) C4(-1.75,2.25) C5(-1.25,2.25) C6(-0.75,2.25) C7(-0.25,2.25) C8(0.25,2.25) C9(0.75,2.25) C10(1.25,2.25) C11(1.75,2.25) C12(2.25,2.25) C13(2.75,2.25) C14(3.25,2.25) D1(-3.25,1.75) D2(-2.75,1.75) D3(-2.25,1.75) D4(-1.75,1.75) D12(2.25,1.75) D13(2.75,1.75) D14(3.25,1.75) E1(-3.25,1.25) E2(-2.75,1.25) E3(-2.25,1.25) E5(-1.25,1.25) E6(-0.75,1.25) E7(-0.25,1.25) E8(0.25,1.25) E9(0.75,1.25) E10(1.25,1.25) E12(2.25,1.25) E13(2.75,1.25) E14(3.25,1.25) F1(-3.25,0.75) F2(-2.75,0.75) F3(-2.25,0.75) F5(-1.25,0.75) F10(1.25,0.75) F12(2.25,0.75) F13(2.75,0.75) F14(3.25,0.75) G1(-3.25,0.25) G2(-2.75,0.25) G3(-2.25,0.25) G5(-1.25,0.25) G10(1.25,0.25) G12(2.25,0.25) G13(2.75,0.25) G14(3.25,0.25) H1(-3.25,-0.25) H2(-2.75,-0.25) H3(-2.25,-0.25) H5(-1.25,-0.25) H10(1.25,-0.25) H12(2.25,-0.25) H13(2.75,-0.25) H14(3.25,-0.25) J1(-3.25,-0.75) J2(-2.75,-0.75) J3(-2.25,-0.75) J5(-1.25,-0.75) J10(1.25,-0.75) J12(2.25,-0.75) J13(2.75,-0.75) J14(3.25,-0.75) K1(-3.25,-1.25) K2(-2.75,-1.25) K3(-2.25,-1.25) K5(-1.25,-1.25) K6(-0.75,-1.25) K7(-0.25,-1.25) K8(0.25,-1.25) K9(0.75,-1.25) K10(1.25,-1.25) K12(2.25,-1.25) K13(2.75,-1.25) K14(3.25,-1.25) L1(-3.25,-1.75) L2(-2.75,-1.75) L3(-2.25,-1.75) L12(2.25,-1.75) L13(2.75,-1.75) L14(3.25,-1.75) M1(-3.25,-2.25) M2(-2.75,-2.25) M3(-2.25,-2.25) M4(-1.75,-2.25) M5(-1.25,-2.25) M6(-0.75,-2.25) M7(-0.25,-2.25) M8(0.25,-2.25) M9(0.75,-2.25) M10(1.25,-2.25) M11(1.75,-2.25) M12(2.25,-2.25) M13(2.75,-2.25) M14(3.25,-2.25) N1(-3.25,-2.75) N2(-2.75,-2.75) N3(-2.25,-2.75) N4(-1.75,-2.75) N5(-1.25,-2.75) N6(-0.75,-2.75) N7(-0.25,-2.75) N8(0.25,-2.75) N9(0.75,-2.75) N10(1.25,-2.75) N11(1.75,-2.75) N12(2.25,-2.75) N13(2.75,-2.75) N14(3.25,-2.75) P1(-3.25,-3.25) P2(-2.75,-3.25) P3(-2.25,-3.25) P4(-1.75,-3.25) P5(-1.25,-3.25) P6(-0.75,-3.25) P7(-0.25,-3.25) P8(0.25,-3.25) P9(0.75,-3.25) P10(1.25,-3.25) P11(1.75,-3.25) P12(2.25,-3.25) P13(2.75,-3.25) P14(3.25,-3.25)
GNDPOINT256
  round 5.08 hole 2.769: 1(0,0)
HDR102
  rect 1.524x1.524 hole 1.016: 1(0,0)
  round 1.524 hole 1.016: 2(0,-2.54)
IND_2016A
  rect 0.864x1.803 smd: 1(-0.835,0) 2(0.835,0)
IND_SPH2520
  rect 1.219x2.007 smd: 1(-1.01,0) 2(1.01,0)
LED_0603
  rect 0.838x0.787 smd: A(-0.775,0) C(0.775,0)
LQFN62_0P6_7P6X7P4
  rect 0.559x0.305 smd: 1(-3.221,2.4) 2(-3.221,1.8) 3(-3.221,1.2) 4(-3.221,0.6) 5(-3.221,0) 6(-3.221,-0.6) 7(-3.221,-1.2) 8(-3.221,-1.8) 9(-3.221,-2.4) 22(3.221,-2.4) 23(3.221,-1.8) 24(3.221,-1.2) 25(3.221,-0.6) 26(3.221,0) 27(3.221,0.6) 28(3.221,1.2) 29(3.221,1.8) 30(3.221,2.4) 43(-1.729,2.098) 44(-1.729,1.498) 45(-1.729,0.898) 46(-1.729,0.298) 47(-1.729,-0.303) 48(-1.729,-0.902) 49(-1.729,-1.502) 50(-1.729,-2.102)
  rect 0.305x0.559 smd: 10(-3.298,-3.121) 11(-2.697,-3.121) 12(-2.098,-3.121) 13(-1.498,-3.121) 14(-0.898,-3.121) 15(-0.298,-3.121) 16(0.303,-3.121) 17(0.902,-3.121) 18(1.502,-3.121) 19(2.102,-3.121) 20(2.702,-3.121) 21(3.303,-3.121) 31(3.303,3.121) 32(2.702,3.121) 33(2.102,3.121) 34(1.502,3.121) 35(0.902,3.121) 36(0.303,3.121) 37(-0.298,3.121) 38(-0.898,3.121) 39(-1.498,3.121) 40(-2.098,3.121) 41(-2.697,3.121) 42(-3.298,3.121)
  rect 0.813x0.813 smd: 51(-0.356,1.644) 52(0.744,1.644) 53(1.844,1.644) 54(-0.356,0.544) 55(0.744,0.544) 56(1.844,0.544) 57(-0.356,-0.557) 58(0.744,-0.557) 59(1.844,-0.557) 60(-0.356,-1.656) 61(0.744,-1.656) 62(1.844,-1.656)
RC0402_25
  round 0.635 smd: 1(-0.508,0) 2(0.508,0)
SC70_3
  rect 0.711x0.889 smd: 1(-0.648,-0.952) 2(0.648,-0.952) 3(0,0.952)
TESTPOINT_35MIL
  round 0.889 smd: 1(0,0)
TPAD_015
  round 0.381 smd: 1(0,0)
TPAD_020
  round 0.508 smd: 1(0,0)
TPAD_050
  round 1.27 smd: 1(0,0)
unnamed#2
  round 1.626 hole 1.626 unplated: (-8.362,8.362) (-8.362,-8.362) (8.362,8.362) (8.362,-8.362)
  round 0.889 hole 0.889 unplated: (-8.362,-3.282) (8.362,5.822)
unnamed#3
  round 1.016 smd: (0,0)
UQFN56_0P4_7X7_EP_S185
  rect 0.686x0.203 smd: 1(-3.39,2.6) 2(-3.39,2.2) 3(-3.39,1.8) 4(-3.39,1.4) 5(-3.39,1) 6(-3.39,0.6) 7(-3.39,0.2) 8(-3.39,-0.2) 9(-3.39,-0.6) 10(-3.39,-1) 11(-3.39,-1.4) 12(-3.39,-1.8) 13(-3.39,-2.2) 14(-3.39,-2.6) 29(3.39,-2.6) 30(3.39,-2.2) 31(3.39,-1.8) 32(3.39,-1.4) 33(3.39,-1) 34(3.39,-0.6) 35(3.39,-0.2) 36(3.39,0.2) 37(3.39,0.6) 38(3.39,1) 39(3.39,1.4) 40(3.39,1.8) 41(3.39,2.2) 42(3.39,2.6)
  rect 0.203x0.686 smd: 15(-2.6,-3.39) 16(-2.2,-3.39) 17(-1.8,-3.39) 18(-1.4,-3.39) 19(-1,-3.39) 20(-0.6,-3.39) 21(-0.2,-3.39) 22(0.2,-3.39) 23(0.6,-3.39) 24(1,-3.39) 25(1.4,-3.39) 26(1.8,-3.39) 27(2.2,-3.39) 28(2.6,-3.39) 43(2.6,3.39) 44(2.2,3.39) 45(1.8,3.39) 46(1.4,3.39) 47(1,3.39) 48(0.6,3.39) 49(0.2,3.39) 50(-0.2,3.39) 51(-0.6,3.39) 52(-1,3.39) 53(-1.4,3.39) 54(-1.8,3.39) 55(-2.2,3.39) 56(-2.6,3.39)
  rect 4.699x4.699 smd: 57(0,0)
  rect 0.508x0.508 smd: 58(-3.385,3.385) 59(-3.385,-3.385) 60(3.385,-3.385) 61(3.385,3.385)
XTAL2-3P2X1P5-SM
  rect 1.092x1.905 smd: 1(-1.25,0) 2(1.25,0)
XTLOSC4_3P2X2P5MM_SM
  rect 1.397x1.194 smd: 1(-1.1,-0.8) 2(1.1,-0.8) 3(1.1,0.8) 4(-1.1,0.8)

## Nets
GND: BH1.1 BH2.1 BH3.1 C1.2 C2.2 C3.2 C5.2 C6.2 C8.2 C9.2 C10.2 C11.2 C12.2 C13.1 C14.1 C15.2 C16.2 C17.2 C18.1 C20.2 C21.2 C23.2 C30.2 C33.2 C35.2 C36.2 C48.2 C54.2 C55.2 C61.2 C65.2 C74.2 C78.2 C88.2 C89.2 C90.2 C91.2 C92.2 C93.2 C94.2 C95.2 C99.2 C100.2 C101.2 C104.2 C105.2 C106.2 C108.2 C109.2 C110.2 C111.2 C112.2 C113.2 C114.2 C115.2 C117.2 C118.2 C119.2 C123.2 C124.2 C127.2 C128.2 C129.2 C130.2 C131.2 C132.2 C133.2 C136.2 C137.2 C138.2 C139.2 C140.2 C141.2 C142.1 C143.2 C144.2 C145.2 C146.2 C147.2 C148.2 C234.1 C235.2 C241.2 C244.2 C245.2 C247.2 C248.2 C251.2 C253.2 C254.2 C255.2 C256.2 C260.2 C264.2 C265.2 C266.2 C267.2 C268.2 C272.1 C273.2 C275.2 C279.1 C281.1 C283.2 C285.2 C287.2 C295.1 C298.2 C299.2 C301.1 C303.2 C304.2 C306.1 C307.1 C311.2 C312.2 C316.1 C317.2 C318.2 C323.1 C324.2 C325.2 C333.2 C337.2 C351.2 C360.2 C363.2 C365.2 C370.2 C371.2 C372.2 C373.2 C374.2 C375.2 C376.2 C378.2 C379.2 C380.2 C381.2 C382.2 C384.2 C391.2 C392.2 C393.2 C394.2 C400.2 C401.1 C402.1 C403.2 C404.2 C405.2 J2.2 J2.3(GND2) J4.1 J4.7 J4.8 J4.13 J4.19 J4.20 J4.25 J4.31 J4.32 J4.37 J4.43 J4.44 J4.49 J4.55 J4.61 J4.67 J4.68 J4.73 J4.79 J4.80 J4.87 J4.92 J4.97 J5.9 J5.10 J5.11 J5.12 J5.13 J5.14 J5.15 J5.16 J5.17 J5.18 J5.19 J5.20 J5.47 J5.48 J5.60 J5.61 J5.72 J5.75 J5.84 J5.89 J5.96 J6.2 J7.3 J7.6 J7.7 J7.16 J7.17 L3.2 L4.2 Q1.2(SOURCE) R4.1 R7.1 R18.2 R23.2 R28.2 R29.2 R30.2 R103.2 R121.1 R122.1 R123.1 R124.1 R135.2 TP44.1(PIN1) TP45.1(PIN1) TP46.1(PIN1) TP47.1(PIN1) U1.A1 U1.A27 U1.AA7 U1.AA9 U1.AA10 U1.AA13 U1.AA15 U1.AA18 U1.AA19 U1.AA21 U1.AB3 U1.AB25 U1.AC3 U1.AC25 U1.AE2 U1.AE5 U1.AE6 U1.AE9 U1.AE10 U1.AE13 U1.AE14 U1.AE15 U1.AE18 U1.AE19 U1.AE22 U1.AE23 U1.AF3 U1.AG1 U1.AG27 U1.B3 U1.B26 U1.C2 U1.C5 U1.C6 U1.C9 U1.C10 U1.C13 U1.C14 U1.C15 U1.C18 U1.C19 U1.C22 U1.C23 U1.E3 U1.E25 U1.F3 U1.F25 U1.G7 U1.G9 U1.G10 U1.G13 U1.G15 U1.G18 U1.G19 U1.G21 U1.H2 U1.H18 U1.J3 U1.J7 U1.J21 U1.J25 U1.K3 U1.K7 U1.K20 U1.K21 U1.K25 U1.L12 U1.L16 U1.M12 U1.M16 U1.N3 U1.N7 U1.N12 U1.N16 U1.N21 U1.N25 U1.P3 U1.P13 U1.P15 U1.P21 U1.P25 U1.R3 U1.R7 U1.R12 U1.R16 U1.R20 U1.R21 U1.R25 U1.T12 U1.T16 U1.U12 U1.U16 U1.V3 U1.V7 U1.V21 U1.V25 U1.W3(VSS99) U1.W7 U1.W21 U1.W25 U1.Y2 U1.Y13 U1.Y18 U2.A3 U2.A10 U2.AB3 U2.AB5 U2.AB8 U2.AB10 U2.C1 U2.C5 U2.C8 U2.C12 U2.D2 U2.D4 U2.D9 U2.D11 U2.E1 U2.E5 U2.E8 U2.E12 U2.G1 U2.G3 U2.G5 U2.G8 U2.G10 U2.G12 U2.J1 U2.J3 U2.J10 U2.J12 U2.K2 U2.K4 U2.K9 U2.K11 U2.N2 U2.N4 U2.N9 U2.N11 U2.P1 U2.P3 U2.P10 U2.P12 U2.T1 U2.T3 U2.T5 U2.T8 U2.T10 U2.T12 U2.V1 U2.V5 U2.V8 U2.V12 U2.W2 U2.W4 U2.W9 U2.W11 U2.Y1 U2.Y5 U2.Y8(VSS_Y8) U2.Y12 U4.A6 U4.C4 U4.E7 U4.G5 U4.H10 U4.J5 U4.K8 U4.N2 U4.N5 U4.P4 U4.P6 U5.4 U5.9 U6.1 U6.2 U6.5 U6.14 U6.19 U6.21 U6.23 U6.25 U6.35 U6.38 U6.43 U6.50 U6.51 U6.52 U6.53 U6.54 U6.55 U6.56 U6.57 U6.58 U6.59 U6.60 U6.61 U6.62 U8.12 U8.57 U8.58 U8.59 U8.60 U8.61 Y1.2 Y1.4
VDD_ARM_0V9: C33.1 C35.1 C36.1 C248.1 C251.1 C253.1 C283.1 C287.1 L6.2 TP23.1(TP) U1.R13 U1.R15 U1.T13 U1.T14 U1.T15 U1.U13 U1.U15 U1.V13 U1.V15 U1.V16 U1.W13 U1.W14 U1.W15 U1.W16 U8.24
VDD_DRAM&PU_0V9: C20.1 C48.1 C54.1 C55.1 C61.1 C65.1 C74.1 C78.1 C303.1 C304.1 L10.2 TP24.1(TP) U1.J10 U1.K12 U1.K13 U1.L10 U1.L11 U1.L13 U1.M13 U1.M14 U1.N10 U1.N11 U1.P9 U1.P12 U1.R10 U1.R11 U1.U10 U1.U11 U1.V12 U1.W10 U1.W11 U8.30
VDD_MIPI_1V2: C244.1 C405.1 R136.1 U1.J15
VDD_PHY_0V9: C1.1 C360.1 TP30.1(TP) U1.J14 U8.42
VDD_PHY_1V2: C351.1 R136.2 TP31.1(TP) U8.44
VDD_SNVS_0V8: C9.1 C337.1 R113.1 TP29.1(TP) U1.K22 U8.8
VDD_SOC_0V8: C15.1 C16.1 C234.2 C235.1 C247.1 C254.1 C255.1 C256.1 C275.1 C285.1 L5.2 TP22.1(TP) U1.J16 U1.J17 U1.K15 U1.K16 U1.L15 U1.L17 U1.L18 U1.M15 U1.N13 U1.N15 U1.N17 U1.N18 U1.P16 U1.R17 U1.R18 U1.U17 U1.U18 U8.17
VDDA_1V8: C99.1 C100.1 C101.1 C104.1 C265.1 C267.1 C363.1 C400.1 TP32.1(TP) U1.AA14 U1.G14 U1.H13 U1.H15 U1.N19 U1.N20 U1.P5 U1.P19 U1.R19 U1.Y15 U8.6
2G_RF_FILTER: U6.20 U6.22
32K_CLKIN: R115.2 U6.15
ANT_IN0: L4.1 R44.2 U6.24
BOOT_MODE0: J4.98 R47.1 U1.G26
BOOT_MODE1: J4.100 R79.1 U1.G27
BT_REG_ON: U1.U27 U6.40
BT_WAKE_DEV: U1.U26 U6.26
BT_WAKE_HOST: U1.W27 U6.17
CLK_32K_OUT: R100.1 U8.29
CLKIN1: J4.94 TP20.1(PIN1) U1.H27
CLKIN2: J4.96 TP21.1(PIN1) U1.J27
CLKOUT1: J4.64 U1.H26
CLKOUT2: J4.66 U1.J26
CSI_CKN: J4.45 U1.A16
CSI_CKP: J4.47 U1.B16
CSI_DN0: J4.33 U1.A14
CSI_DN1: J4.39 U1.A15
CSI_DN2: J4.51 U1.A17
CSI_DN3: J4.57 U1.A18
CSI_DP0: J4.35 U1.B14
CSI_DP1: J4.41 U1.B15
CSI_DP2: J4.53 U1.B17
CSI_DP3: J4.59 U1.B18
DRAM_CA0_A: U1.J6 U2.R2
DRAM_CA0_B: U1.W6 U2.H2
DRAM_CA1_A: U1.K6 U2.P2
DRAM_CA1_B: U1.V6 U2.J2
DRAM_CA2_A: U1.E4 U2.R9
DRAM_CA2_B: U1.AC4 U2.H9
DRAM_CA3_A: U1.D5 U2.R10
DRAM_CA3_B: U1.AD5 U2.H10
DRAM_CA4_A: U1.N4 U2.R11
DRAM_CA4_B: U1.R4 U2.H11
DRAM_CA5_A: U1.N5 U2.P11
DRAM_CA5_B: U1.R5 U2.J11
DRAM_CK_C_A: R8.2 U1.L1 U2.P9
DRAM_CK_C_B: R9.2 U1.U1 U2.J9
DRAM_CK_T_A: R8.1 U1.L2 U2.P8
DRAM_CK_T_B: R9.1 U1.U2 U2.J8
DRAM_CKE0_A: R121.2 U1.F4 U2.P4
DRAM_CKE0_B: R123.2 U1.AB4 U2.J4
DRAM_CKE1_A: R122.2 U1.F5 U2.P5
DRAM_CKE1_B: R124.2 U1.AB5 U2.J5
DRAM_DATA0_A: U1.A5 U2.AA11
DRAM_DATA0_B: U1.AB2 U2.B2
DRAM_DATA1_A: U1.B5 U2.Y11
DRAM_DATA1_B: U1.AA2 U2.C2
DRAM_DATA2_A: U1.D2 U2.V11
DRAM_DATA2_B: U1.W1 U2.F2
DRAM_DATA3_A: U1.D1 U2.U11
DRAM_DATA3_B: U1.W2 U2.E2
DRAM_DATA4_A: U1.C1 U2.U9
DRAM_DATA4_B: U1.V2 U2.E4
DRAM_DATA5_A: U1.B1 U2.V9
DRAM_DATA5_B: U1.V1 U2.F4
DRAM_DATA6_A: U1.A3 U2.Y9
DRAM_DATA6_B: U1.AC1 U2.B4
DRAM_DATA7_A: U1.B4 U2.AA9
DRAM_DATA7_B: U1.AC2 U2.C4
DRAM_DATA8_A: U1.F2 U2.AA2
DRAM_DATA8_B: U1.AG5 U2.B11
DRAM_DATA9_A: U1.G2 U2.Y2
DRAM_DATA9_B: U1.AF5 U2.C11
DRAM_DATA10_A: U1.J1 U2.V4
DRAM_DATA10_B: U1.AD2 U2.E11
DRAM_DATA11_A: U1.J2 U2.V2
DRAM_DATA11_B: U1.AD1 U2.F11
DRAM_DATA12_A: U1.K2 U2.U2
DRAM_DATA12_B: U1.AE1 U2.F9
DRAM_DATA13_A: U1.K1 U2.U4
DRAM_DATA13_B: U1.AF1 U2.E9
DRAM_DATA14_A: U1.E1 U2.AA4
DRAM_DATA14_B: U1.AG3 U2.C9
DRAM_DATA15_A: U1.E2 U2.Y4
DRAM_DATA15_B: U1.AF4 U2.B9
DRAM_DMI0_A: U1.A4 U2.Y10
DRAM_DMI0_B: U1.AB1 U2.C3
DRAM_DMI1_A: U1.F1 U2.Y3
DRAM_DMI1_B: U1.AG4 U2.C10
DRAM_NCS0_A: U1.K4 U2.R4
DRAM_NCS0_B: U1.V4 U2.H4
DRAM_NCS1_A: U1.J4 U2.R3
DRAM_NCS1_B: U1.W4 U2.H3
DRAM_NRESET: R4.2 U1.R1 U2.T11
DRAM_SDQS0_C_A: U1.B2 U2.V10
DRAM_SDQS0_C_B: U1.Y1 U2.E3
DRAM_SDQS0_T_A: U1.A2 U2.W10
DRAM_SDQS0_T_B: U1.AA1 U2.D3
DRAM_SDQS1_C_A: U1.H1 U2.V3
DRAM_SDQS1_C_B: U1.AF2 U2.E10
DRAM_SDQS1_T_A: U1.G1 U2.W3
DRAM_SDQS1_T_B: U1.AG2 U2.D10
DRAM_VREF: TP37.1(PIN1) U1.P1
DRAM_ZQ0: R5.2 U2.A5
DRAM_ZQ1: R6.2 U2.A8
DSI_CKN: J4.15 U1.A11
DSI_CKP: J4.17 U1.B11
DSI_DN0: J4.3 U1.A9
DSI_DN1: J4.9 U1.A10
DSI_DN2: J4.21 U1.A12
DSI_DN3: J4.27 U1.A13
DSI_DP0: J4.5 U1.B9
DSI_DP1: J4.11 U1.B10
DSI_DP2: J4.23 U1.B12
DSI_DP3: J4.29 U1.B13
ECSPI2_MISO: J4.16 U1.A8
ECSPI2_MOSI: J4.18 U1.B8
ECSPI2_SCLK: J4.14 U1.E6
ECSPI2_SS0: J4.12 U1.A6
EMMC_VDDIM: C136.1 C137.1 U4.C2
ENET_MDC: J7.18 U1.AC27
ENET_MDIO: J7.20 U1.AB27
ENET_RD0: J7.8 U1.AE27
ENET_RD1: J7.10 U1.AD27
ENET_RD2: J7.12 U1.AD26
ENET_RD3: J7.14 U1.AC26
ENET_RX_CTL: J7.2 U1.AF27
ENET_RXC: J7.4 U1.AE26
ENET_TD0: J7.9 U1.AG26
ENET_TD1: J7.11 U1.AF26
ENET_TD2: J7.13 U1.AG25
ENET_TD3: J7.15 U1.AF25
ENET_TX_CTL: J7.1 U1.AF24
ENET_TXC: J7.5 U1.AG24
GPIO1_IO01: J5.64 U1.AF14
GPIO1_IO05: J5.62 U1.AF12
GPIO1_IO06: J5.58 U1.AG11
GPIO1_IO07: J5.56 U1.AF11
GPIO1_IO08: J5.54 U1.AG10
GPIO1_IO09: J5.52 U1.AF10
GPIO1_IO10: J5.50 U1.AD10
GPIO1_IO11: J5.46 U1.AC10
GPIO1_IO12: J5.44 U1.AB10
GPIO1_IO13: J5.42 U1.AD9
GPIO1_IO14: J5.40 U1.AC9
GPIO1_IO15: J5.38 U1.AB9
I2C1_SCL: R10.2 R48.1 U1.E9
I2C1_SDA: R11.2 R54.1 U1.F9
I2C2_SCL: J4.22 R12.2 U1.D10
I2C2_SDA: J4.24 R13.2 U1.D9
I2C3_SCL: J4.26 R14.2 U1.E10
I2C3_SDA: J4.28 R15.2 U1.F10
I2C4_SCL: J4.30 R16.2 U1.D13
I2C4_SDA: J4.34 R17.2 U1.E13
INTLDO_1V5: C273.1 TP52.1(PIN1) U8.11
JTAG_MOD: R23.1 U1.D27
JTAG_NTRST: J4.60 TP1.1(PIN1) U1.C27
JTAG_TCK: J4.62 R18.1 TP4.1(PIN1) U1.F26
JTAG_TDI: J4.54 TP2.1(PIN1) U1.E27
JTAG_TDO: J4.52 TP5.1(PIN1) U1.E26
JTAG_TMS: J4.58 TP3.1(PIN1) U1.F27
LDO5_VOUT: U8.4
M.2_32K_OUT: J5.37 R116.2
NC1: U1.J18
NVCC_1V8: C3.1 C5.1 C13.2 C18.2 C21.1 C23.1 C105.1 C106.1 C108.1 C109.1 C130.1 C131.1 C132.1 C133.1 C138.1 C139.1 C144.1 C145.1 C146.1 C147.1 C148.1 C241.1 C266.1 C317.1 C318.1 C370.1 C371.1 C372.1 C384.1 C404.1 J5.22 J5.24 J5.26 J5.28 J5.30 J5.32 J5.34 J5.36 L13.2 R10.1 R11.1 R12.1 R13.1 R14.1 R15.1 R16.1 R17.1 R37.1 R47.2 R79.2 R106.1 R117.1 R118.1 TP26.1(TP) U1.AB13 U1.J11 U1.J12 U1.J13 U1.L19 U1.M19 U1.T19 U1.U19 U1.V19 U1.V20 U1.W12 U2.F1 U2.F12 U2.G4 U2.G9 U2.T4 U2.T9 U2.U1 U2.U12 U4.C6 U4.M4 U4.N4 U4.P3 U4.P5 U5.8 U6.12 U6.16 U6.36 U6.37 U6.42 U8.43 U8.54 U8.56
NVCC_3V3: C6.1 C8.1 C14.2 C30.1 C127.1 C128.1 C129.1 C142.2 C143.1 C260.1 C264.1 C311.1 C312.1 C403.1 J5.21 J5.23 J5.25 J5.27 J5.29 J5.31 J5.33 J5.35 L11.2 R71.2 R72.2 R75.2 R76.2 R95.2 R97.2 R125.1 TP25.1(TP) U1.H10 U1.K19 U1.W17 U1.W18 U1.Y10 U4.E6 U4.F5 U4.J10 U4.K9 U6.41 U8.1 U8.7 U8.46
NVCC_DRAM_1V1: C88.1 C89.1 C90.1 C91.1 C92.1 C93.1 C94.1 C95.1 C110.1 C111.1 C112.1 C113.1 C114.1 C115.1 C117.1 C118.1 C119.1 C324.1 C325.1 C373.1 C374.1 C375.1 C376.1 C378.1 C379.1 C380.1 C381.1 C382.1 L15.2 R5.1 R6.1 TP27.1(TP) U1.K8 U1.K9 U1.L9 U1.M9 U1.N8 U1.N9 U1.P7 U1.R8 U1.R9 U1.T9 U1.U9 U1.V8 U1.V9 U2.A4 U2.A9 U2.AA3 U2.AA5 U2.AA8 U2.AA10 U2.AB4 U2.AB9 U2.B3 U2.B5 U2.B8 U2.B10 U2.D1 U2.D5 U2.D8 U2.D12 U2.F3 U2.F5 U2.F8 U2.F10 U2.G2 U2.H1 U2.H5 U2.H8 U2.H12 U2.K1 U2.K3 U2.K10 U2.K12 U2.N1 U2.N3 U2.N10 U2.N12 U2.R1 U2.R5 U2.R8 U2.R12 U2.T2 U2.U3 U2.U5 U2.U8 U2.U10 U2.W1 U2.W5 U2.W8 U2.W12 U8.38
NVCC_ENET: C2.1 C392.1 J7.19 U1.W22
NVCC_SD2: C17.1 C365.1 R119.1 R120.1 R133.1 TP33.1(TP) U1.V22 U8.55
NVCC_SNVS_1V8: C272.2 C333.1 C391.1 R20.1 R21.1 R61.1 R102.1 TP28.1(TP) U1.J22 U8.10 U8.28
ONOFF: J4.46 R21.2 TP7.1(TP) U1.A25
PCIE_CLKN: J4.75 U1.A21
PCIE_CLKP: J4.77 U1.B21
PCIE_RXN: J4.63 U1.A19
PCIE_RXP: J4.65 U1.B19
PCIE_TXN: J4.69 U1.A20
PCIE_TXP: J4.71 U1.B20
PDM_CLK: J5.65 U1.AC15
PDM_DATA0: J5.67 U1.AD18
PDM_DATA1: J5.69 U1.AC14
PDM_DATA2: J5.71 U1.AD13
PDM_DATA3: J5.73 U1.AC13
PMIC_NINT: U1.AF13 U8.39
PMIC_ON_REQ: J4.48 R51.1 TP6.1(TP) U1.A24
PMIC_STBY_REQ: R52.1 TP10.1(TP) U1.E24
POR_B: J4.50 R20.2 R114.2 TP9.1(TP) U1.B24
PWM_1V1: L2.1 U6.3
QSPIA_DATA0: TP16.1(TP) U1.P23 U5.5
QSPIA_DATA1: U1.K24 U5.2
QSPIA_DATA2: U1.K23 U5.3(W\/DQ2)
QSPIA_DATA3: U1.N23 U5.7
QSPIA_NSS0: R37.2 U1.N24 U5.1
QSPIA_SCLK: TP17.1(TP) U1.N22 U5.6
REF_CLK_32K: R115.1 R116.1 U1.AG14
RF_ANT0: J2.1 L3.1 R44.1
RTC_RESET_B: R102.2 R111.2 TP8.1(TP) U1.F24
SAI1_MCLK: J5.98 U1.AB18
SAI1_RXC: J5.76 U1.AF16
SAI1_RXD0: J5.78 U1.AG15
SAI1_RXD1: J5.80 R76.1 U1.AF15
SAI1_RXD2: J5.82 R75.1 U1.AG17
SAI1_RXD3: J5.86 U1.AF17
SAI1_RXD4: J5.88 U1.AG18
SAI1_RXD5: J5.90 R72.1 U1.AF18
SAI1_RXD6: J5.92 R71.1 U1.AG19
SAI1_RXD7: J5.94 U1.AF19
SAI1_RXFS: J5.74 U1.AG16
SAI1_TXC: J5.81 U1.AC18
SAI1_TXD0: J5.83 U1.AG20
SAI1_TXD1: J5.85 U1.AF20
SAI1_TXD2: J5.87 U1.AG21
SAI1_TXD3: J5.91 R97.1 U1.AF21
SAI1_TXD4: J5.93 U1.AG22
SAI1_TXD5: J5.95 R95.1 U1.AF22
SAI1_TXD6: J5.97 U1.AG23
SAI1_TXD7: J5.99 U1.AF23
SAI1_TXFS: J5.100 U1.AB19
SAI2_MCLK: J5.66 U1.AD19
SAI2_RXC: J5.79 U1.AB22
SAI2_RXD: R132.2 U1.AC24
SAI2_RXD_RES: R132.1 U6.34
SAI2_RXFS: J5.68 U1.AC19
SAI2_TXC: R129.2 U1.AD22
SAI2_TXC_RES: R129.1 U6.31
SAI2_TXD: R131.2 U1.AC22
SAI2_TXD_RES: R131.1 U6.33
SAI2_TXFS: R130.2 U1.AD23
SAI2_TXFS_RES: R130.1 U6.32
SAI3_MCLK: J5.41 U1.AD6
SAI3_RXC: J5.53 U1.AG7
SAI3_RXD: J5.55 U1.AF7
SAI3_RXFS: J5.51 U1.AG8
SAI3_TXC: J5.45 U1.AG6
SAI3_TXD: J5.49 U1.AF6
SAI3_TXFS: J5.43 U1.AC6
SAI5_MCLK: J5.77 U1.AD15
SAI5_RXFS: J5.70 U1.AB15
SD1_CLK: TP48.1(PIN1) U1.V26 U6.11
SD1_CMD: TP49.1(PIN1) U1.V27 U6.10
SD1_DATA0: TP50.1(PIN1) U1.Y27 U6.9
SD1_DATA1: U1.Y26 U6.8
SD1_DATA2: U1.T27 U6.7
SD1_DATA3: U1.T26 U6.6
SD1_STROBE: J4.70 U1.R24
SD2_CLK: J4.76 U1.W23
SD2_CMD: J4.78 R120.2 U1.W24
SD2_DATA0: J4.84 R119.2 U1.AB23
SD2_DATA1: J4.82 U1.AB24
SD2_DATA2: J4.72 U1.V24
SD2_DATA3: J4.74 U1.V23
SD2_NCD: J4.88 U1.AA26
SD2_NRST: J4.90 R133.2 U1.AB26
SD2_VSEL: U1.AG12 U8.45
SD2_WP: J4.86 U1.AA27
SD3_CLK: TP34.1(PIN1) U1.R26 U4.M6
SD3_CMD: R118.2 TP35.1(PIN1) U1.R27 U4.M5
SD3_DATA0: R117.2 TP36.1(PIN1) U1.M26 U4.A3
SD3_DATA1: U1.L26 U4.A4
SD3_DATA2: U1.K26 U4.A5
SD3_DATA3: U1.N26 U4.B2
SD3_DATA4: U1.N27 U4.B3
SD3_DATA5: U1.M27 U4.B4
SD3_DATA6: U1.L27 U4.B5
SD3_DATA7: U1.K27 U4.B6
SD3_STROBE: TP40.1(PIN1) U1.P27 U4.H5
SPDIF_EXT_CLK: J5.63 U1.AF8
SPDIF_RX: J5.59 U1.AG9
SPDIF_TX: J5.57 U1.AF9
SYS_NRST: J5.39 R127.1
SYS_STATUS: Q1.1 U1.P26
TEST_MODE: J4.56 R134.2
TESTMODE: R134.1 R135.1 U1.D26
TS_RES_EXT: R103.1 U1.J24
TS_TEST_OUT: TP19.1(PIN1) U1.J23
UART1_CTS: U1.E18 U6.30
UART1_RTS: U1.D18 U6.29
UART1_RXD: U1.E14 U6.28
UART1_TXD: U1.F13 U6.27
UART2_RXD: J4.36 U1.F15
UART2_TXD: J4.38 U1.E15
UART3_CTS: J4.10 U1.A7
UART3_RTS: J4.2 U1.B6
UART3_RXD: J4.4 U1.D6
UART3_TXD: J4.6 U1.B7
UART4_RXD: J4.40 U1.F19
UART4_TXD: J4.42 U1.F18
USB1_DN: J4.83 U1.A22
USB1_DP: J4.85 U1.B22
USB1_ID: J4.89 U1.D22
USB1_VBUS: C393.1 J4.81 R108.2
USB2_DN: J4.93 U1.A23
USB2_DP: J4.95 U1.B23
USB2_ID: J4.99 U1.D23
USB2_VBUS: C394.1 J4.91 R109.2
